# Altium PCB PCB.PcbDoc
Units mil, origin at the board's own origin, x right, y up, seen from the top; angles counter-clockwise.
Board outline 4500 x 5499 mil, 2 copper layers (Top Layer, Bottom Layer); 64 components, 104 nets, 271 pads, 0 vias.
Unrouted connection lines stored in the file: 8.
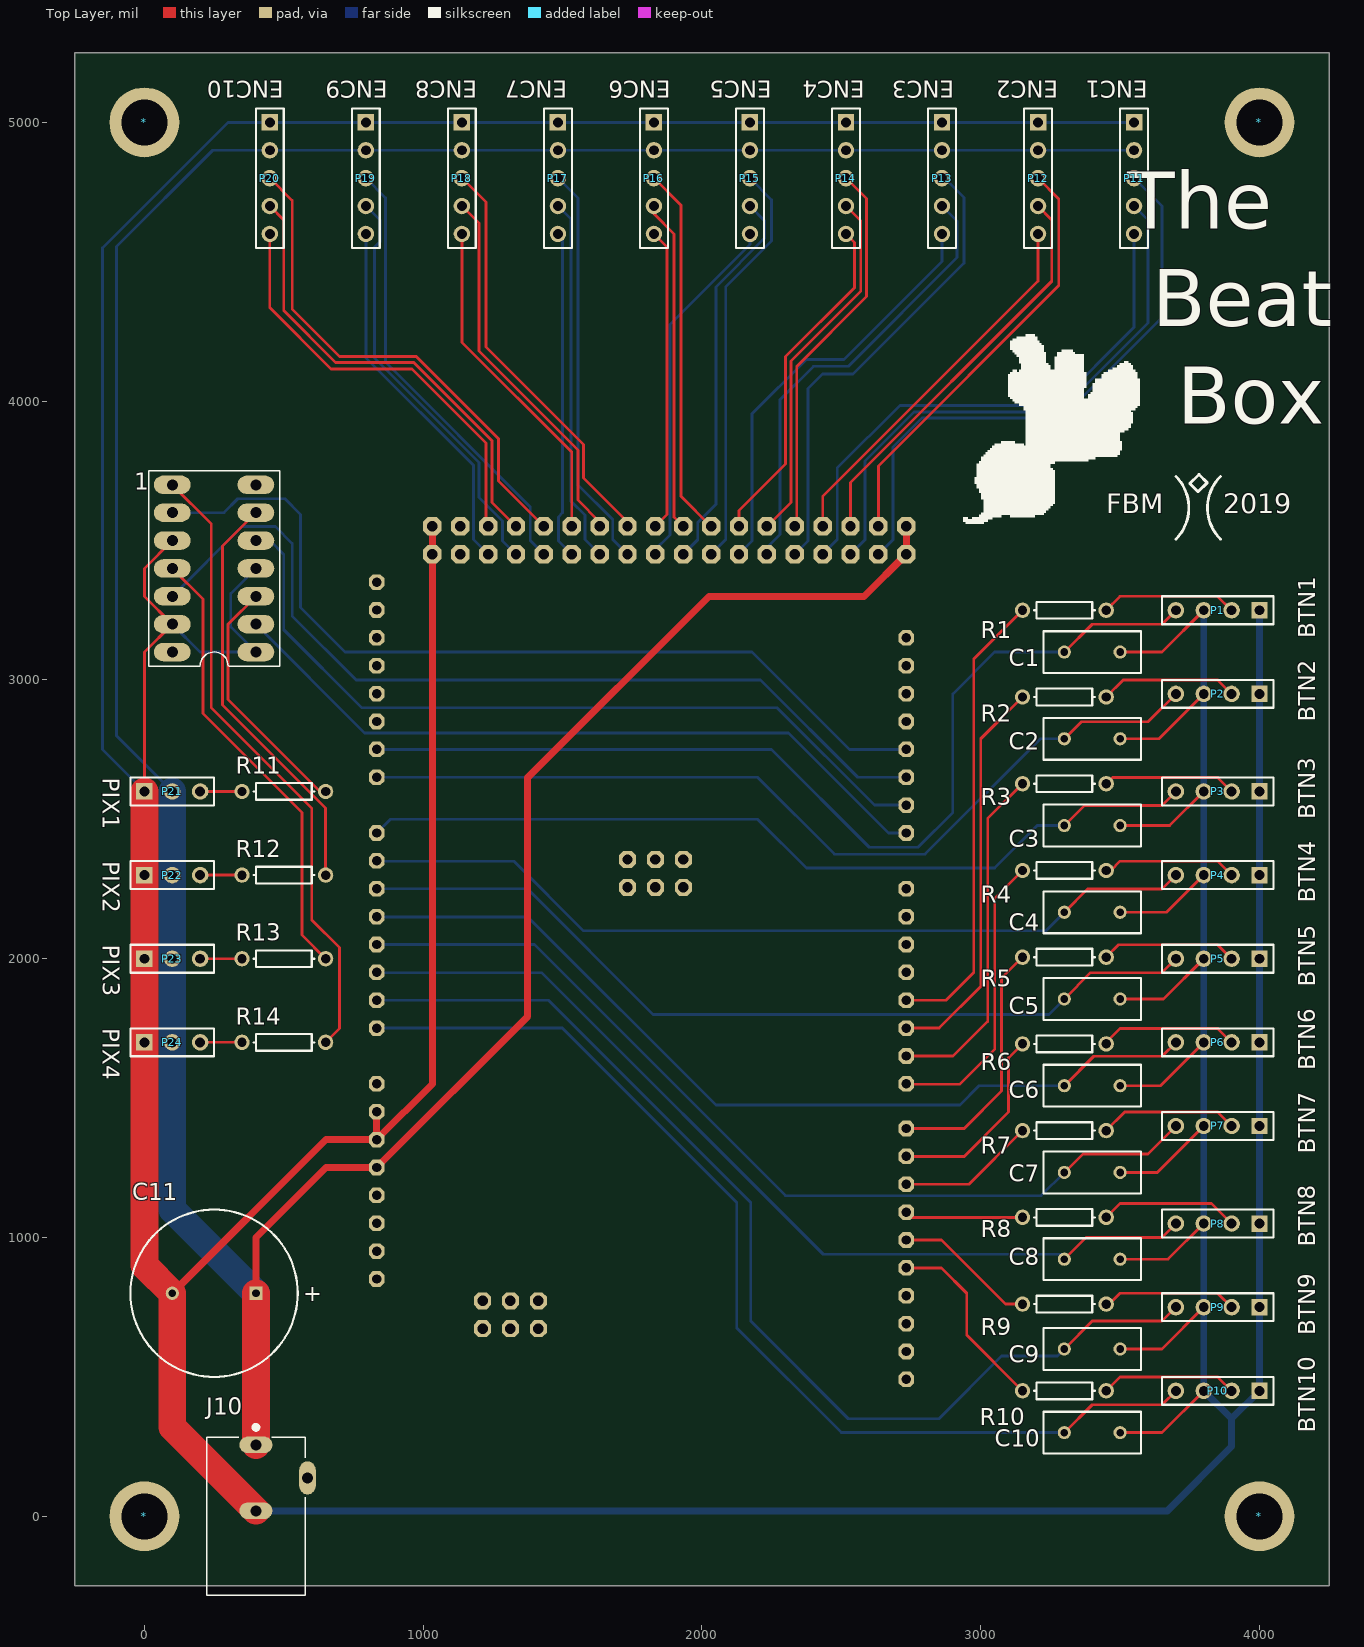
[diagram p0: Top Layer view]
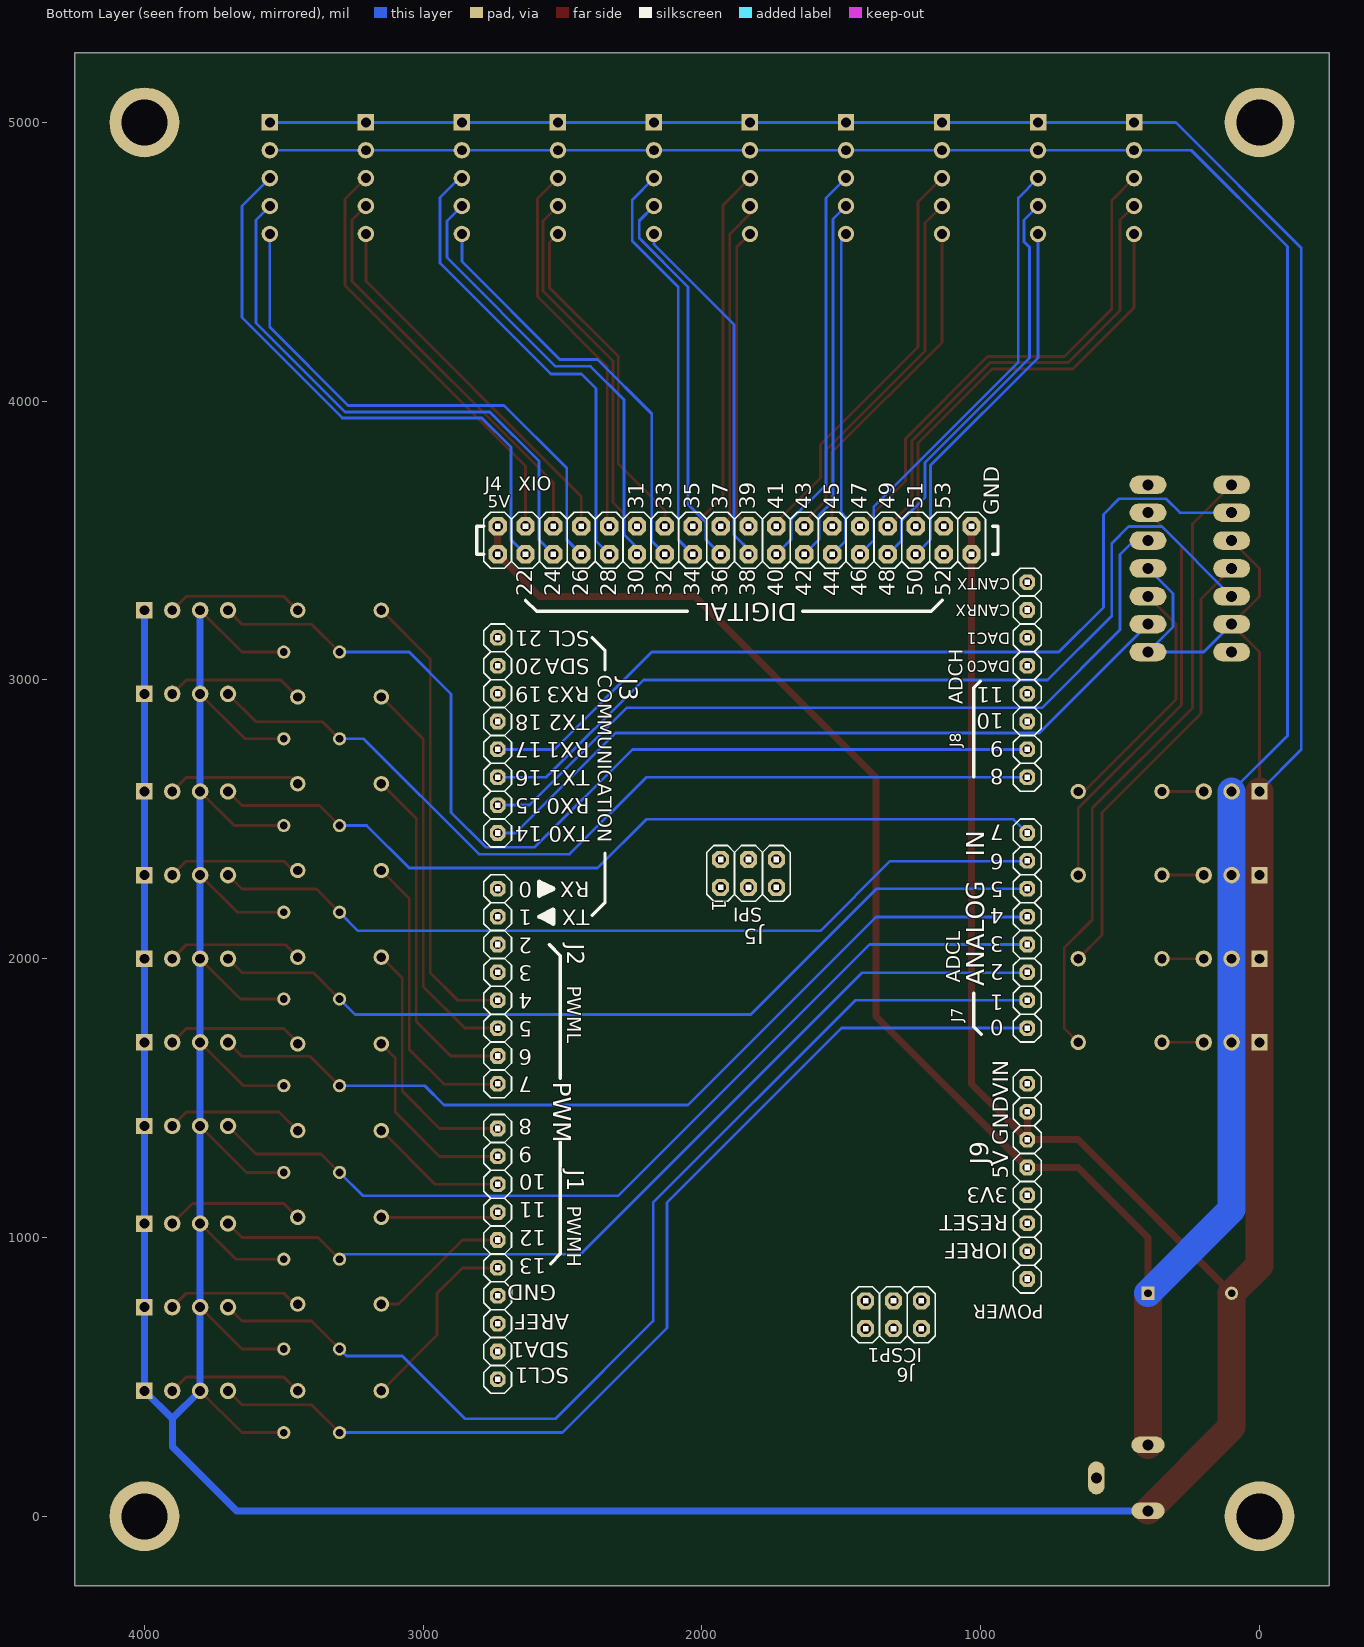
[diagram p1: Bottom Layer view, seen from below]

## Layer stack, top to bottom
Top Solder: solder mask 0.4, Solder Resist, Dk 3.5
Top Layer: signal copper 1.4
Dielectric1: dielectric 12.6, FR-4, Dk 4.8
Bottom Layer: signal copper 1.4
Bottom Solder: solder mask 0.4, Solder Resist, Dk 3.5

## Board outline
-250,-249 4250,-249 4250,5250 -250,5250

## Design rules (kind name [scope] priority, off if disabled: settings)
AssemblyTestPointUsage [All] p1 off:
AssemblyTestpoint [All] p1 off: testpointundercomponent=TRUE minsize=40 maxsize=100 preferedsize=60 minholesize=0 maxholesize=40 preferedholesize=32 testpointgrid=1 usegrid=TRUE gridtolerance=0.01 allowsidetop=TRUE allowsidebottom=TRUE
Clearance [All] p1 off: gap=8 ignorepadtopadclearanceinfootprint=FALSE
PolygonConnect [All] p1: connectstyle=Relief reliefconductorwidth=10 reliefentries=4 polygonreliefangle="90 Angle" airgapwidth=10
RoutingVias [All] p1: holewidth=28 width=50 viastyle="Through Hole" minholewidth=28 minwidth=50 maxholewidth=28 maxwidth=50
SolderMaskExpansion [All] p1: expansion=4
Width [All] p1: maxlimit=100 minlimit=10 preferedwidth=10 minimp=50.000000 maximp=50.000000 favimp=50.000000
28 further rules are at their usual default settings.

## Classes and differential pairs
component class Arduino: J1 J2 J3 J4 J5 J6 J7 J8 J9
component class "Beat Box Schematic": 1 * ? C1 C2 C3 C4 C5 C6 C7 C8 C9 C10 C11 J10 P1 P2 P3 P4 P5 P6 P7 P8 P9 P10 P11 P12 P13 P14 P15 P16 P17 P18 P19 P20 P21 P22 P23 P24 P? R1 R2 R3 R4 R5 R6 R7 R8 R9 R10 R11 R12 R13 R14

## Components (designator, comment, footprint, x,y, rotation, side; value= is the part's Value field where it differs from the comment)
1 "74AHC125" *14DIP 400,3100 r180 top
* "Mount Hole" "6-32 Mount Hole" 4000,5000 r0 top locked
* "Mount Hole" "6-32 Mount Hole" 0,5000 r0 top locked
* "Mount Hole" "6-32 Mount Hole" 0,0 r0 top locked
* "Mount Hole" "6-32 Mount Hole" 4000,0 r0 top locked
C1 "Cap" RAD-0.2 3400,3100 r180 top value=100pF
C2 "Cap" RAD-0.2 3400,2788.89 r180 top value=100pF
C3 "Cap" RAD-0.2 3400,2477.78 r180 top value=100pF
C4 "Cap" RAD-0.2 3400,2166.67 r180 top value=100pF
C5 "Cap" RAD-0.2 3400,1855.56 r180 top value=100pF
C6 "Cap" RAD-0.2 3400,1544.44 r180 top value=100pF
C7 "Cap" RAD-0.2 3400,1233.33 r180 top value=100pF
C8 "Cap" RAD-0.2 3400,922.22 r180 top value=100pF
C9 "Cap" RAD-0.2 3400,600 r180 top value=100pF
C10 "Cap" RAD-0.2 3400,300 r180 top value=100pF
C11 "Cap Pol1" RB7.6-15 250,800 r0 top value=1000uF
J1 "PWMH" 1X10 2732.98,941 r270 bottom locked
J2 "PWML" 1X08 2732.98,1901 r270 bottom locked
J3 "COMMUNICATION" 1X08 2732.98,2801 r90 bottom locked
J4 "XIO" 2X18 1882.98,3501 r180 bottom locked
J5 "SPI" 2X03 1832.98,2306 r180 bottom locked
J6 "ICSP1" 2X03 1312.98,723 r0 bottom locked
J7 "ADCL" 1X08 832.98,2101 r90 bottom locked
J8 "ADCH" 1X08 832.98,3001 r90 bottom locked
J9 "POWER" 1X08 832.98,1201 r90 bottom locked
J10 "PJ-102AH" *CUI_PJ-102AH 400,0 r270 top
P1 "BTN1" HDR1X4 4000,3250 r180 top
P2 "BTN2" HDR1X4 4000,2950 r180 top
P3 "BTN3" HDR1X4 4000,2600 r180 top
P4 "BTN4" HDR1X4 4000,2300 r180 top
P5 "BTN5" HDR1X4 4000,2000 r180 top
P6 "BTN6" HDR1X4 4000,1700 r180 top
P7 "BTN7" HDR1X4 4000,1400 r180 top
P8 "BTN8" HDR1X4 4000,1050 r180 top
P9 "BTN9" HDR1X4 4000,750 r180 top
P10 "BTN10" HDR1X4 4000,450 r180 top
P11 "ENC1" HDR1X5 3550,5000 r270 top
P12 "ENC2" HDR1X5 3205.56,5000 r270 top
P13 "ENC3" HDR1X5 2861.11,5000 r270 top
P14 "ENC4" HDR1X5 2516.67,5000 r270 top
P15 "ENC5" HDR1X5 2172.22,5000 r270 top
P16 "ENC6" HDR1X5 1827.78,5000 r270 top
P17 "ENC7" HDR1X5 1483.33,5000 r270 top
P18 "ENC8" HDR1X5 1138.89,5000 r270 top
P19 "ENC9" HDR1X5 794.44,5000 r270 top
P20 "ENC10" HDR1X5 450,5000 r270 top
P21 "PIX1" HDR1X3 0,2600 r0 top
P22 "PIX2" HDR1X3 0,2300 r0 top
P23 "PIX3" HDR1X3 0,2000 r0 top
P24 "PIX4" HDR1X3 0,1700 r0 top
R1 "Res1" AXIAL-0.3 3300,3250 r0 top value=220
R2 "Res1" AXIAL-0.3 3300,2938.89 r0 top value=220
R3 "Res1" AXIAL-0.3 3300,2627.78 r0 top value=220
R4 "Res1" AXIAL-0.3 3300,2316.67 r0 top value=220
R5 "Res1" AXIAL-0.3 3300,2005.56 r0 top value=220
R6 "Res1" AXIAL-0.3 3300,1694.44 r0 top value=220
R7 "Res1" AXIAL-0.3 3300,1383.33 r0 top value=220
R8 "Res1" AXIAL-0.3 3300,1072.22 r0 top value=220
R9 "Res1" AXIAL-0.3 3300,761.11 r0 top value=220
R10 "Res1" AXIAL-0.3 3300,450 r0 top value=220
R11 "Res1" AXIAL-0.3 500,2600 r180 top value=470
R12 "Res1" AXIAL-0.3 500,2300 r180 top value=470
R13 "Res1" AXIAL-0.3 500,2000 r180 top value=470
R14 "Res1" AXIAL-0.3 500,1700 r180 top value=470

## Footprints (in the part's own frame and the unit in brackets; to place one, negate y for a bottom-side part, rotate by r counter-clockwise, add the part's x,y. Pads: shape width x height; smd on the part's side, far side on the other; paste and mask are expansions set on the pad)
1X08 [mil]
  oct 56x56 hole 33.46: 1(-350,0) 2(-250,0) 3(-150,0) 4(-50,0) 5(50,0) 6(150,0) 7(250,0) 8(350,0)
  silkscreen extent -400,-50 400,50
1X10 [mil]
  oct 56x56 hole 33.46: 1(-450,0) 2(-350,0) 3(-250,0) 4(-150,0) 5(-50,0) 6(50,0) 7(150,0) 8(250,0) 9(350,0) 10(450,0)
  silkscreen extent -500,-50 500,50
2X03 [mm]
  oct 1.55x1.55 hole 0.95: 1(-2.54,-1.27) 2(-2.54,1.27) 3(0,-1.27) 4(0,1.27) 5(2.54,-1.27) 6(2.54,1.27)
  silkscreen extent -3.81,-2.54 3.81,2.54
2X18 [mil]
  oct 66x66 hole 37.4: 1(-850,-50) 2(-850,50) 3(-750,-50) 4(-750,50) 5(-650,-50) 6(-650,50) 7(-550,-50) 8(-550,50) 9(-450,-50) 10(-450,50) 11(-350,-50) 12(-350,50) 13(-250,-50) 14(-250,50) 15(-150,-50) 16(-150,50) 17(-50,-50) 18(-50,50) 19(50,-50) 20(50,50) 21(150,-50) 22(150,50) 23(250,-50) 24(250,50) 25(350,-50) 26(350,50) 27(450,-50) 28(450,50) 29(550,-50) 30(550,50) 31(650,-50) 32(650,50) 33(750,-50) 34(750,50) 35(850,-50) 36(850,50)
  silkscreen extent -900,-100 900,100
"6-32 Mount Hole" [mil]
  round 250 hole 165: 0(0,0)
*14DIP [mil]
  oval 132x66 hole 39.37: 1(0,0) 2(0,-100) 3(0,-200) 4(0,-300) 5(0,-400) 6(0,-500) 7(0,-600) 8(300,-600) 9(300,-500) 10(300,-400) 11(300,-300) 12(300,-200) 13(300,-100) 14(300,0)
  silkscreen extent -85,-650 385,50
*CUI_PJ-102AH [mm]
  oval 1.508x3.016 hole 1: 1(-6.5,0) 2(-0.5,0)
  oval 3.016x1.508 hole 1: 3(-3.5,4.7)
  silkscreen extent -8.3,-4.5 7.2,4.5
AXIAL-0.3 [mm] "Axial Device, Thru-Hole; 2 Leads; 0.3 in Pin Spacing"
  round 1.4 hole 0.85: 1(-3.81,0) 2(3.81,0)
  silkscreen extent -2.77,-0.76 2.77,0.76
HDR1X3 [mm] "Connector; Header; 3 Position"
  rect 1.5x1.5 hole 0.9: 1(0,0)
  round 1.5 hole 0.9: 2(2.54,0) 3(5.08,0)
  silkscreen extent -1.27,-1.27 6.35,1.27
HDR1X4 [mm] "Connector; Header; 4 Position"
  rect 1.5x1.5 hole 0.9: 1(0,0)
  round 1.5 hole 0.9: 2(2.54,0) 3(5.08,0) 4(7.62,0)
  silkscreen extent -1.27,-1.27 8.89,1.27
HDR1X5 [mm] "Connector; Header; 5 Position"
  rect 1.5x1.5 hole 0.9: 1(0,0)
  round 1.5 hole 0.9: 2(2.54,0) 3(5.08,0) 4(7.62,0) 5(10.16,0)
  silkscreen extent -1.27,-1.27 11.43,1.27
RAD-0.2 [mm] "Radial Cap, Thru-Hole; 2 Leads; 0.2 in Pin Spacing"
  round 1.2 hole 0.7: 1(-2.54,0) 2(2.54,0)
  silkscreen extent -4.44,-1.91 4.44,1.91
RB7.6-15 [mm] "Polarized Capacitor (Radial); 2 Leads"
  rect 1.2x1.2 hole 0.7: 1(3.81,0)
  round 1.2 hole 0.7: 2(-3.81,0)
  silkscreen extent -7.62,-7.62 7.62,7.62

## Part data
1: Package="TSSOP-14 Texas Instruments", Availability=Unavailable, MF="Texas Instruments", MP=74AHC125, Price=None, SnapEDA_Link=https://www.snapeda.com/parts/74AHC125/Texas%20Instruments/view-part/?ref=snap
C1 C2 C3 C4 C5 C6 C7 C8 C9 C10: "Capacitor", LatestRevisionDate=17-Jul-2002, LatestRevisionNote="Re-released for DXP Platform.", PackageDescription="Radial Cap, Thru-Hole; 2 Leads; 0.3 in Pin Spacing", PackageReference=RAD-0.3, Published=8-Jun-2000, Publisher="Altium Limited"
C11: "Polarized Capacitor (Radial)", LatestRevisionDate=17-Jul-2002, LatestRevisionNote="Re-released for DXP Platform.", PackageDescription="Polarized Capacitor (Radial); 2 Leads", PackageReference=RB7.6-15, Published=8-Jun-2000, Publisher="Altium Limited"
J1: library part PINHD-1X10
J2 J3 J7 J8 J9: library part PINHD-1X8
J4: library part PINHD-2X18
J5 J6: library part PINHD-2X3
P1 P2 P3 P4 P5 P6 P7 P8 P9 P10: library part "Header 4", "Header, 4-Pin", LatestRevisionDate=17-Jul-2002, LatestRevisionNote="Re-released for DXP Platform.", Publisher="Altium Limited"
P11 P12 P13 P14 P15 P16 P17 P18 P19 P20: library part "Header 5", "Header, 5-Pin", LatestRevisionDate=17-Jul-2002, LatestRevisionNote="Re-released for DXP Platform.", Publisher="Altium Limited"
P21 P22 P23 P24: library part "Header 3", "Header, 3-Pin", LatestRevisionDate=17-Jul-2002, LatestRevisionNote="Re-released for DXP Platform.", Publisher="Altium Limited"
R1 R2 R3 R4 R5 R6 R7 R8 R9 R10 R11 R12 R13 R14: "Resistor", LatestRevisionDate=17-Jul-2002, LatestRevisionNote="Re-released for DXP Platform.", PackageDescription="Axial Device, Thru-Hole; 2 Leads; 0.3 in Pin Spacing", PackageReference=AXIAL-0.3, Published=8-Jun-2000, Publisher="Altium Limited"

## Nets (pads, with @x,y where several pads share a name; then routed paths per layer and width w, separated by ;. In a path a pad name is that pad's centre, name@x,y a point inside that pad or via, vN(x,y) a via of type N, cw(c..) or ccw(c..) an arc to the next point about the centre after c; other vN are vias at no path point)
+3V3: J9.2 J9.4
+5V: 1.14 C11.1 J4.1 J4.2 J5.2 J6.2 J9.5 J10.1 P11.2 P12.2 P13.2 P14.2 P15.2 P16.2 P17.2 P18.2 P19.2 P20.2 P21.2 P22.2 P23.2 P24.2 | length 12449.3
  Top Layer w25: C11.1 400,1000 651,1251 J9.5 1375,1793.02 1375,2650 2025,3300 2581.98,3300 J4.1 J4.2
  Top Layer w100: J10.1 C11.1
  Bottom Layer w10: P21.2 -100,2800 -100,4555 245,4900 P20.2 P19.2 P18.2 P17.2 P16.2 P15.2 P14.2 P13.2 P12.2 P11.2
  Bottom Layer w100: P21.2 P22.2 P23.2 P24.2 100,1100 C11.1
AD0: C10.2 J7.1 P10.4 | length 3793.8
  Top Layer w10: C10.2 3400,400 3650,400 P10.4
  Bottom Layer w10: J7.1 1499,1751 2125,1125 2125,675 2500,300 C10.2
AD1: C9.2 J7.2 P9.4 | length 3903.4
  Top Layer w10: C9.2 3400,700 3650,700 P9.4
  Bottom Layer w10: J7.2 1449,1851 2175,1125 2175,700 2525,350 2850,350 3075,575 3275,575 C9.2
AD2: C8.2 J7.3 P8.4 | length 3356.5
  Top Layer w10: C8.2 3377.78,1000 3650,1000 P8.4
  Bottom Layer w10: J7.3 833.98,1950 1425,1950 2435,940 3300,940 C8.2
AD3: C7.2 J7.4 P7.4 | length 3343.8
  Top Layer w10: C7.2 3366.67,1300 3600,1300 P7.4
  Bottom Layer w10: J7.4 1399,2051 2300,1150 3216.67,1150 C7.2
AD4: C6.2 J7.5 P6.4 | length 3240.2
  Top Layer w10: C6.2 3405.56,1650 3650,1650 P6.4
  Bottom Layer w10: J7.5 833.98,2150 1375,2150 2050,1475 2925,1475 2994.44,1544.44 C6.2
AD5: C5.2 J7.6 P5.4 | length 3136.7
  Top Layer w10: C5.2 3394.44,1950 3650,1950 P5.4
  Bottom Layer w10: J7.6 1374,2251 1825,1800 3244.44,1800 C5.2
AD6: C4.2 J7.7 P4.4 | length 3053.8
  Top Layer w10: C4.2 3383.33,2250 3650,2250 P4.4
  Bottom Layer w10: J7.7 833.98,2350 1325,2350 1575,2100 3233.33,2100 C4.2
AD7: C3.2 J7.8 P3.4 | length 3073.7
  Top Layer w10: C3.2 3372.22,2550 3650,2550 P3.4
  Bottom Layer w10: J7.8 881.98,2500 2200,2500 2375,2325 3050,2325 3202.78,2477.78 C3.2
AD8: C2.2 J8.1 P2.4 | length 3219.5
  Top Layer w10: C2.2 3361.11,2850 3600,2850 P2.4
  Bottom Layer w10: J8.1 2199,2651 2475,2375 2800,2375 3213.89,2788.89 C2.2
AD9: C1.2 J8.2 P1.4 | length 3613.4
  Top Layer w10: C1.2 3400,3200 3650,3200 P1.4
  Bottom Layer w10: J8.2 2249,2751 2600,2400 2775,2400 2900,2525 2900,2950 3050,3100 C1.2
AD10: J8.3
AD11(TXD3): J8.4
AD14(RXD3): J4.33
AREF: J1.8
CANRX0: J8.7
CANTX0: J8.8
CANTX1/IO: J4.34
DAC0(CANRX1): J8.5
DAC1: J8.6
GND: 1.1 1.4 1.10 1.13 C1.1 C2.1 C3.1 C4.1 C5.1 C6.1 C7.1 C8.1 C9.1 C10.1 C11.2 J1.7 J4.35 J4.36 J5.6 J6.6 J9.6 J9.7 J10.2 P1.1 P1.3 P2.1 P2.3 P3.1 P3.3 P4.1 P4.3 P5.1 P5.3 P6.1 P6.3 P7.1 P7.3 P8.1 P8.3 P9.1 P9.3 P10.1 P10.3 P11.1 P12.1 P13.1 P14.1 P15.1 P16.1 P17.1 P18.1 P19.1 P20.1 P21.1 P22.1 P23.1 P24.1 | length 26912.3
  Top Layer w10: P21.1 0,3100 1.13 0,3300 0,3400 1.10 ; C10.1 3650,300 P10.3 ; C9.1 3650,600 P9.3 ; C8.1 3672.22,922.22 P8.3 ; C7.1 3633.33,1233.33 P7.3 ; C6.1 3644.44,1544.44 P6.3 ; C5.1 3655.56,1855.56 P5.3 ; C4.1 3666.67,2166.67 P4.3 ; C3.1 3677.78,2477.78 P3.3 ; C2.1 3638.89,2788.89 P2.3 ; C1.1 3650,3100 P1.3
  Top Layer w25: C11.2 651,1351 J9.6 ; J9.7 J9.6 ; J4.36 J4.35 1032.98,1551 J9.6
  Top Layer w100: P21.1 P22.1 P23.1 P24.1 0,900 C11.2 100,319.68 J10.2
  Bottom Layer w10: P21.1 -150,2750 -150,4550 300,5000 P20.1 P19.1 P18.1 P17.1 P16.1 P15.1 P14.1 P13.1 P12.1 P11.1 ; 1.13 200,3100 1.1 310,3190 310,3310 1.4
  Bottom Layer w25: J10.2 3669.69,19.68 3900,250 3900,350 ; P1.3 P2.3 P3.3 P4.3 P5.3 P6.3 P7.3 P8.3 P9.3 P10.3 3900,350 ; P1.1 P2.1 P3.1 P4.1 P5.1 P6.1 P7.1 P8.1 P9.1 P10.1 3900,350
MASTER-RESET: J5.5 J9.3
MISO: J5.1
MISO2: J6.1
MOSI: J5.4
MOSI2: J6.4
NetJ9_1: J9.1
NetP1_2: P1.2 R1.2 | length 491.4
  Top Layer w10: R1.2 3500,3300 3850,3300 P1.2
NetP2_2: P2.2 R2.2 | length 496
  Top Layer w10: R2.2 3511.11,3000 3850,3000 P2.2
NetP3_2: P3.2 R3.2 | length 479.9
  Top Layer w10: R3.2 3472.22,2650 3850,2650 P3.2
NetP4_2: P4.2 R4.2 | length 484.5
  Top Layer w10: R4.2 3466.67,2316.67 3500,2350 3850,2350 P4.2
NetP5_2: P5.2 R5.2 | length 489.1
  Top Layer w10: R5.2 3494.44,2050 3850,2050 P5.2
NetP6_2: P6.2 R6.2 | length 497
  Top Layer w10: R6.2 3450,1700 3500,1750 3850,1750 P6.2
NetP7_2: P7.2 R7.2 | length 498.3
  Top Layer w10: R7.2 3516.67,1450 3850,1450 P7.2
NetP8_2: P8.2 R8.2 | length 500.6
  Top Layer w10: R8.2 3500,1122.22 3827.78,1122.22 P8.2
NetP9_2: P9.2 R9.2 | length 486.8
  Top Layer w10: R9.2 3461.11,761.11 3500,800 3850,800 P9.2
NetP10_2: P10.2 R10.2 | length 491.4
  Top Layer w10: R10.2 3500,500 3850,500 P10.2
NetP21_3: P21.3 R11.2 | length 150
  Top Layer w10: P21.3 R11.2
NetP22_3: P22.3 R12.2 | length 150
  Top Layer w10: P22.3 R12.2
NetP23_3: P23.3 R13.2 | length 150
  Top Layer w10: P23.3 R13.2
NetP24_3: P24.3 R14.2 | length 150
  Top Layer w10: P24.3 R14.2
PIN22: J4.3 P11.3 | length 2104.6
  Bottom Layer w10: J4.3 2685,3503.02 2685,3835 2790,3940 3290,3940 3650,4300 3650,4700 P11.3
PIN23: J4.4 P12.3 | length 1547.8
  Top Layer w10: J4.4 2632.98,3767.98 3280,4415 3280,4725.56 P12.3
PIN24: J4.5 P11.4 | length 2016.2
  Bottom Layer w10: J4.5 2585,3503.02 2585,3785 2761,3961 3280.8,3961 3600,4280.2 3600,4650 P11.4
PIN25: J4.6 P12.4 | length 1468.6
  Top Layer w10: J4.6 2532.98,3707.98 3255,4430 3255,4650.56 P12.4
PIN26: J4.7 P11.5 | length 1939.7
  Bottom Layer w10: J4.7 2485,3503.02 2485,3760 2710,3985 3270,3985 3550,4265 P11.5
PIN27: J4.8 P12.5 | length 1369
  Top Layer w10: J4.8 2432.98,3657.98 3205.56,4430.56 P12.5
PIN28: J4.9 P13.3 | length 1702.8
  Bottom Layer w10: J4.9 2380,3498.02 2380,4045 2432,4097 2542,4097 2940,4495 2940,4730 2870,4800 P13.3
PIN29: J4.10 P14.3 | length 1385.8
  Top Layer w10: J4.10 2340,3558.02 2340,4125 2590,4375 2590,4726.67 P14.3
PIN30: J4.11 P13.4 | length 1627
  Bottom Layer w10: J4.11 2232.98,3475 2280,3522.02 2280,4005 2400,4125 2525,4125 2915,4515 2915,4646.11 P13.4
PIN31: J4.12 P14.4 | length 1310.7
  Top Layer w10: J4.12 2318.98,3637 2318.98,4143.98 2570,4395 2570,4646.67 P14.4
PIN32: J4.13 P13.5 | length 1529.7
  Bottom Layer w10: J4.13 2180,3498.02 2180,3955 2375,4150 2510,4150 2861.11,4501.11 P13.5
PIN33: J4.14 P14.5 | length 1233.1
  Top Layer w10: J4.14 2132.98,3607.98 2300,3775 2300,4160 2547,4407 2547,4569.67 P14.5
PIN34: J4.15 P15.3 | length 1471.1
  Bottom Layer w10: J4.15 2085,3503.02 2085,4410 2250,4575 2250,4722.22 P15.3
PIN35: J4.16 P16.3 | length 1334
  Top Layer w10: P16.3 1925,4702.78 1925,3658.98 J4.16
PIN36: J4.17 P15.4 | length 1391.8
  Bottom Layer w10: J4.17 1985,3503.02 1985,3565.25 2050,3630.25 2050,4410 2225,4585 2225,4647.22 P15.4
PIN37: J4.18 P16.4 | length 1192.6
  Top Layer w10: P16.4 1827.78,4672.22 1900,4600 1900,3583.98 J4.18
PIN38: J4.19 P15.5 | length 1311.1
  Bottom Layer w10: J4.19@1825,3475 J4.19@1825,3460 ; J4.19 1825,3458.98 J4.19@1825,3460 ; P15.5 2172.22,4562.22 1885,4275 1885,3520 J4.19@1825,3460
PIN39: J4.20 P16.5 | length 1086
  Top Layer w10: P16.5 1875,4552.78 1875,3593.02 J4.20
PIN40: J4.21 P17.3 | length 1452.4
  Bottom Layer w10: P17.3 1555,4728.33 1555,3700 1680,3575 1680,3503.98 J4.21
PIN41: J4.22 P18.3 | length 1495.1
  Top Layer w10: P18.3 1225,4713.89 1225,4195 1575,3845 1575,3725 1732.98,3567.02 J4.22
PIN42: J4.23 P17.4 | length 1311
  Bottom Layer w10: P17.4 1530,4653.33 1530,3641.23 1580,3591.23 1580,3503.98 J4.23
PIN43: J4.24 P18.4 | length 1353.7
  Top Layer w10: P18.4 1200,4638.89 1200,4180 1555,3825 1555,3645 1632.98,3567.02 J4.24
PIN44: J4.25 P17.5 | length 1182
  Bottom Layer w10: P17.5 1500,4583.33 1500,3600 1485,3585 1485,3498.98 J4.25
PIN45: J4.26 P18.5 | length 1212.2
  Top Layer w10: P18.5 1138.89,4211.11 1532.98,3817.02 J4.26
PIN46: J4.27 P19.3 | length 1613.5
  Bottom Layer w10: P19.3 865,4729.44 865,4140 1383.98,3621.02 1383.98,3500 J4.27
PIN47: J4.28 P20.3 | length 1817.3
  Top Layer w10: P20.3 530,4720 530,4330 700,4160 975,4160 1269.96,3865.04 1269.96,3714.02 J4.28
PIN48: J4.29 P19.4 | length 1488.6
  Bottom Layer w10: P19.4 845,4649.44 845,4572.03 825,4552.03 825,4155 1200,3780 1200,3655 1285,3570 1285,3498.98 J4.29
PIN49: J4.30 P20.4 | length 1678.8
  Top Layer w10: P20.4 500,4650 500,4325 686,4139 966,4139 1246.98,3858.02 1246.98,3637 J4.30
PIN50: J4.31 P19.5 | length 1330.6
  Bottom Layer w10: P19.5 794.44,4155.56 1180,3770 1180,3503.98 J4.31
PIN51: J4.32 P20.5 | length 1543.2
  Top Layer w10: P20.5 450,4335 670,4115 960,4115 1225,3850 1225,3558.98 J4.32
PWM2: J2.3
PWM3: J2.4
PWM5: J2.6 R2.1 | length 1429.8
  Top Layer w10: J2.6 2851,1751 3000,1900 3000,2788.89 R2.1
PWM6: J2.7 R3.1 | length 1247.9
  Top Layer w10: J2.7 2901,1651 3025,1775 3025,2502.78 R3.1
PWM7: J2.8 R4.1 | length 1052.3
  Top Layer w10: J2.8 2733.98,1550 2925,1550 3050,1675 3050,2216.67 R4.1
PWM8: J1.1 R5.1 | length 909.1
  Top Layer w10: J1.1 2941,1391 3075,1525 3075,1930.56 R5.1
PWM9: J1.2 R6.1 | length 698
  Top Layer w10: J1.2 2941,1291 3100,1450 3100,1644.44 R6.1
PWM11: J1.4 R8.1 | length 424.8
  Top Layer w10: J1.4 2751.76,1072.22 R8.1
PWM12: J1.5 R9.1 | length 512.2
  Top Layer w10: J1.5 2859,991 3088.89,761.11 R9.1
PWM13: J1.6 R10.1 | length 687.6
  Top Layer w10: J1.6 2859,891 2950,800 2950,650 R10.1
RESET2: J6.5
RX: J2.1
RXD0: 1.5 J3.2 | length 2884.2
  Bottom Layer w10: 1.5 450,3500 500,3450 500,3180 780,2900 2270,2900 2619,2551 J3.2
RXD0_5V: 1.6 R12.1 | length 1503
  Top Layer w10: 1.6 280,3480 280,2910 650,2540 R12.1
RXD1: 1.9 J3.4 | length 3221.7
  Bottom Layer w10: 1.9 285,3600 335,3650 504,3650 560,3594 560,3260 720,3100 2180,3100 2529,2751 J3.4
RXD1_5V: 1.8 R14.1 | length 2269.2
  Top Layer w10: 1.8 240,3560 240,2900 600,2540 600,2140 700,2040 700,1750 R14.1
RXD2: J3.6
SCK2: J6.3
SCL0-3: J3.8
SCL1: J1.10
SDA0-3: J3.7
SDA1: J1.9
SPCK: J5.3
SS0/PWM10: J1.3 R7.1 | length 496.7
  Top Layer w10: J1.3 2957.67,1191 R7.1
SS1/PWM4: J2.5 R1.1 | length 1655.5
  Top Layer w10: J2.5 2876,1851 2975,1950 2975,3075 R1.1
TX: J2.2
TXD0: 1.2 J3.1 | length 2643.2
  Bottom Layer w10: 1.2 790,2810 2310,2810 2669,2451 J3.1
TXD0_5V: 1.3 R11.1 | length 898.1
  Top Layer w10: 1.3 300,3200 300,2930 630,2600 R11.1
TXD1: 1.12 J3.3 | length 3261.2
  Bottom Layer w10: 1.12 350,3550 470,3550 530,3490 530,3230 760,3000 2210,3000 2559,2651 J3.3
TXD1_5V: 1.11 R13.1 | length 1627.8
  Top Layer w10: 1.11 210,3290 210,2880 565,2525 565,2085 R13.1
TXD2: J3.5
VIN: J9.8
pads on no net: 1.7 *.0 J10.3

## Silkscreen, mask and mechanical layers (free items; w line width, h text height)
Top Overlay:
  drawing of 7 lines, arcs and shapes, not listed
  text "The /  Beat /   Box" at 3525,3850 h350
  text "FBM       2019" at 3450,3575 h120
Bottom Overlay:
  lines w12: 957.98,3451 937.98,3451 937.98,3551 957.98,3551 ; 996.98,1728 1024.98,1756 1024.98,1876 ; 1001.98,2995 1024.98,2972 1024.98,2653.02 ; 1137.98,3286 1177.98,3246 1637.98,3246 ; 2052.98,3246 2592.98,3246 2632.98,3286 ; 2347.98,2378.02 2347.98,2201 2392.98,2156 ; 2347.98,3036 2347.98,3106 2392.98,3151 ; 2507.98,1351 2507.98,941 2542.98,906 ; 2507.98,1571 2507.98,2011 2547.98,2051 ; 2782.98,3451 2807.98,3451 2807.98,3551 2782.98,3551
  lines w16: 2532.98,2126 2532.98,2151 ; 2532.98,2126 2557.98,2151 ; 2532.98,2126 2582.98,2151 2532.98,2176 ; 2532.98,2151 2532.98,2176 ; 2532.98,2151 2557.98,2151 ; 2532.98,2176 2557.98,2151 ; 2557.98,2251 2582.98,2251 ; 2557.98,2251 2582.98,2276 ; 2557.98,2251 2582.98,2226 ; 2582.98,2226 2582.98,2251 ; 2582.98,2226 2532.98,2251 2582.98,2276 ; 2582.98,2251 2582.98,2276
  text "5V" at 2768.98,3618.02 h44
  text "53" at 1107.98,3613.02 h56 r270
  text "51" at 1207.98,3613.02 h56 r270
  text "49" at 1307.98,3613.02 h56 r270
  text "47" at 1407.98,3613.02 h56 r270
  text "45" at 1507.98,3613.02 h56 r270
  text "43" at 1607.98,3613.02 h56 r270
  text "41" at 1707.98,3613.02 h56 r270
  text "39" at 1807.98,3613.02 h56 r270
  text "37" at 1907.98,3613.02 h56 r270
  text "35" at 2007.98,3613.02 h56 r270
  text "33" at 2107.98,3613.02 h56 r270
  text "31" at 2207.98,3613.02 h56 r270
  text "GND" at 932.98,3591 h56 r270
  text "CANTX" at 893.98,3364 h40 r180
  text "52" at 1107.98,3301 h56 r270
  text "50" at 1207.98,3301 h56 r270
  text "48" at 1307.98,3301 h56 r270
  text "46" at 1407.98,3301 h56 r270
  text "44" at 1507.98,3301 h56 r270
  text "42" at 1607.98,3301 h56 r270
  text "40" at 1707.98,3301 h56 r270
  text "38" at 1807.98,3301 h56 r270
  text "36" at 1907.98,3301 h56 r270
  text "34" at 2007.98,3301 h56 r270
  text "32" at 2107.98,3301 h56 r270
  text "30" at 2207.98,3301 h56 r270
  text "28" at 2307.98,3301 h56 r270
  text "26" at 2407.98,3301 h56 r270
  text "24" at 2507.98,3301 h56 r270
  text "22" at 2607.98,3301 h56 r270
  text "DIGITAL" at 1657.98,3276 h66 r180
  text "CANRX" at 893.98,3269 h40 r180
  text "SCL" at 2402.98,3176 h56 r180
  text "21" at 2572.98,3176 h56 r180
  text "DAC1" at 893.98,3169 h40 r180
  text "SDA" at 2402.98,3076 h56 r180
  text "20" at 2572.98,3076 h56 r180
  text "DAC0" at 893.98,3069 h40 r180
  text "RX3" at 2402.98,2976 h56 r180
  text "19" at 2572.98,2976 h56 r180
  text "11" at 917.98,2973 h56 r180
  text "10" at 917.98,2881 h56 r180
  text "TX2" at 2402.98,2876 h56 r180
  text "18" at 2572.98,2876 h56 r180
  text "9" at 917.98,2781 h56 r180
  text "RX1" at 2402.98,2776 h56 r180
  text "17" at 2572.98,2776 h56 r180
  text "8" at 917.98,2681 h56 r180
  text "TX1" at 2402.98,2676 h56 r180
  text "16" at 2572.98,2676 h56 r180
  text "RX0" at 2402.98,2576 h56 r180
  text "15" at 2572.98,2576 h56 r180
  text "7" at 917.98,2481 h56 r180
  text "TX0" at 2402.98,2476 h56 r180
  text "14" at 2572.98,2476 h56 r180
  text "6" at 917.98,2376 h56 r180
  text "5" at 917.98,2276 h56 r180
  text "RX" at 2402.98,2276 h56 r180
  text "0" at 2607.98,2276 h56 r180
  text "1" at 1962.5,2210.67 h50 r90
  text "4" at 917.98,2181 h56 r180
  text "TX" at 2402.98,2176 h56 r180
  text "1" at 2607.98,2176 h56 r180
  text "3" at 917.98,2081 h56 r180
  text "2" at 2607.98,2076 h56 r180
  text "2" at 917.98,1981 h56 r180
  text "3" at 2607.98,1976 h56 r180
  text "ANALOG   IN" at 986.98,1902 h66 r270
  text "4" at 2607.98,1876 h56 r180
  text "1" at 917.98,1871 h56 r180
  text "0" at 917.98,1781 h56 r180
  text "5" at 2607.98,1776 h56 r180
  text "6" at 2607.98,1676 h56 r180
  text "7" at 2607.98,1576 h56 r180
  text "PWM" at 2533.98,1558.02 h66 r90
  text "VIN" at 901.15,1502.48 h56 r270
  text "8" at 2607.98,1426 h56 r180
  text "GND" at 901.15,1330.48 h56 r270
  text "9" at 2607.98,1326 h56 r180
  text "10" at 2557.98,1226 h56 r180
  text "5V" at 901.15,1210.48 h56 r270
  text "3V3" at 900.46,1179.83 h56 r180
  text "11" at 2557.98,1126 h56 r180
  text "RESET" at 900.46,1079.83 h56 r180
  text "12" at 2557.98,1026 h56 r180
  text "IOREF" at 900.46,979.83 h56 r180
  text "13" at 2557.98,926 h56 r180
  text "GND" at 2523.46,830.25 h56 r180
  text "AREF" at 2476.46,724.83 h56 r180
  text "SDA1" at 2476.46,624.83 h56 r180
  text "SCL1" at 2476.46,532.83 h56 r180
Mechanical 1:
  the board outline again, w10
Mechanical 20:
  lines w10: 696.96,301 832.98,301 832.98,164.98 ; 696.96,3551 832.98,3551 832.98,3414.98 ; 1032.98,2487.02 1032.98,2351 1169,2351 ; 1996.96,2351 2132.98,2351 2132.98,2214.98 ; 2322.98,3613.02 2222.98,3751 932.98,3751 832.98,3651 772.35,3651 ccw(c772.35,3611.63) 732.98,3611.63 732.98,-209.63 ccw(c772.35,-209.63) 772.35,-249 2793.61,-249 ccw(c2793.61,-209.63) 2832.98,-209.63 2832.98,3591 2772.98,3651 2322.98,3651 ; 2596.96,351 2732.98,351 2732.98,214.98 ; 2596.96,3301 2732.98,3301 2732.98,3164.98

## Text inside footprints (layer, text, board x,y; h text height)
C11: Top Overlay "+" at 570.15,770.99 h59.06